# EAGLE board 4_digit_shift (EAGLE 5.06)
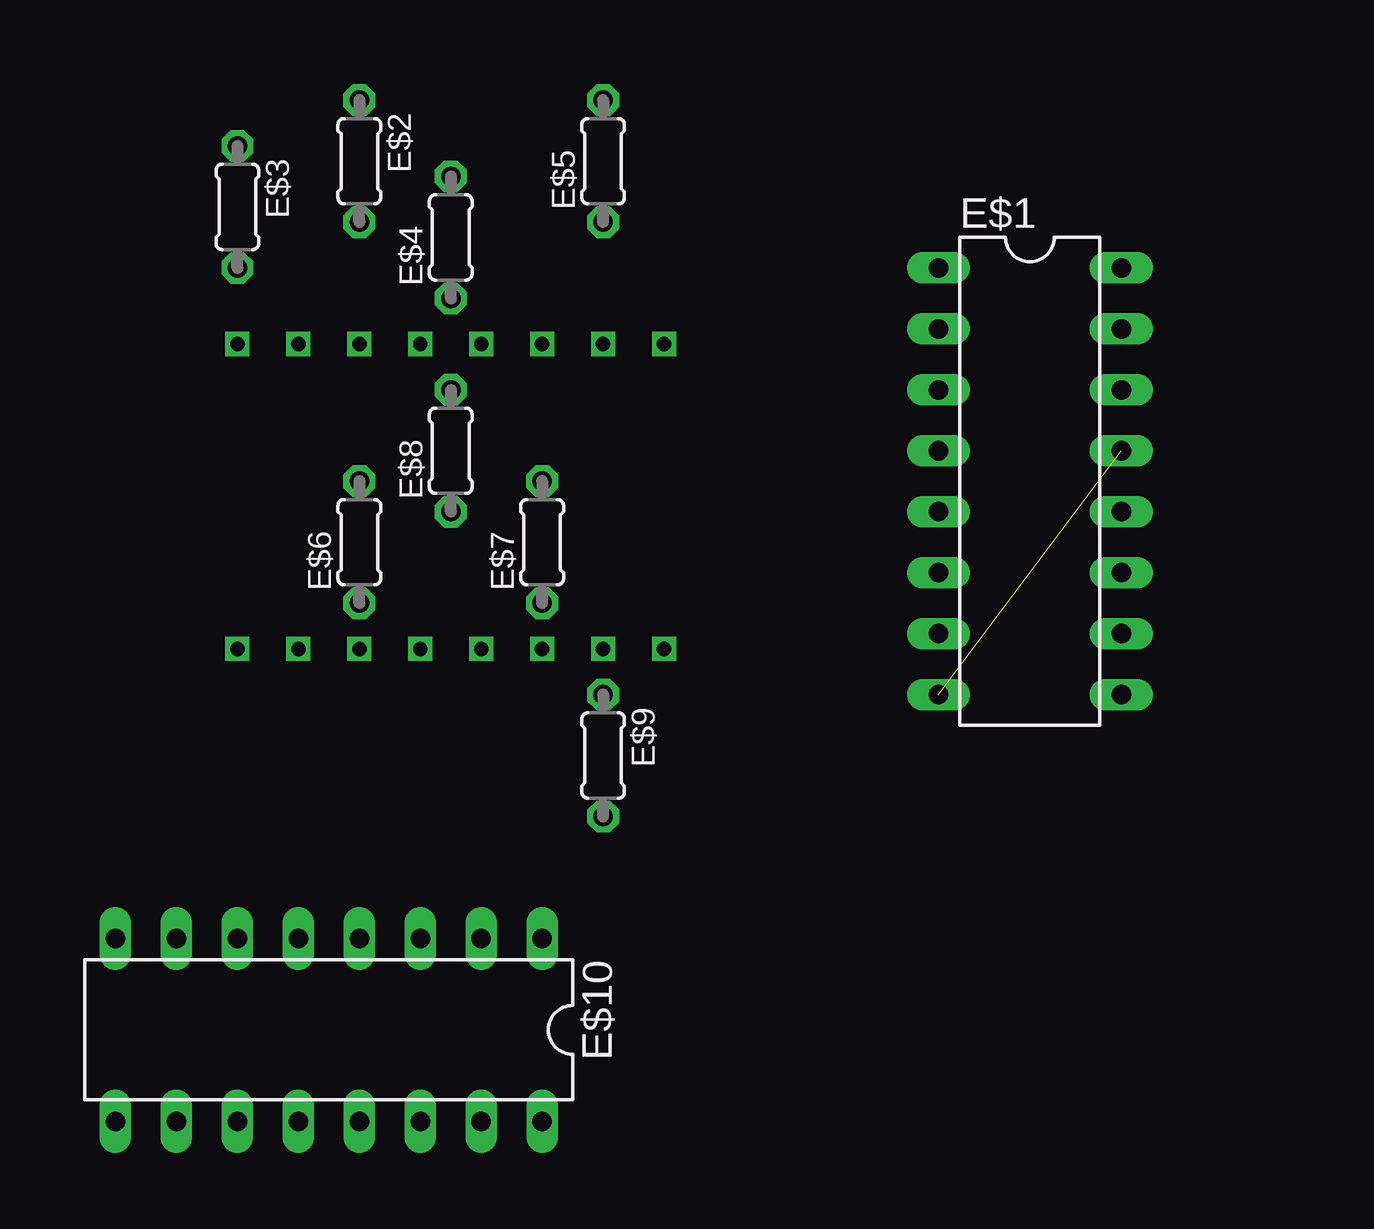
[diagram p0: board, top side]
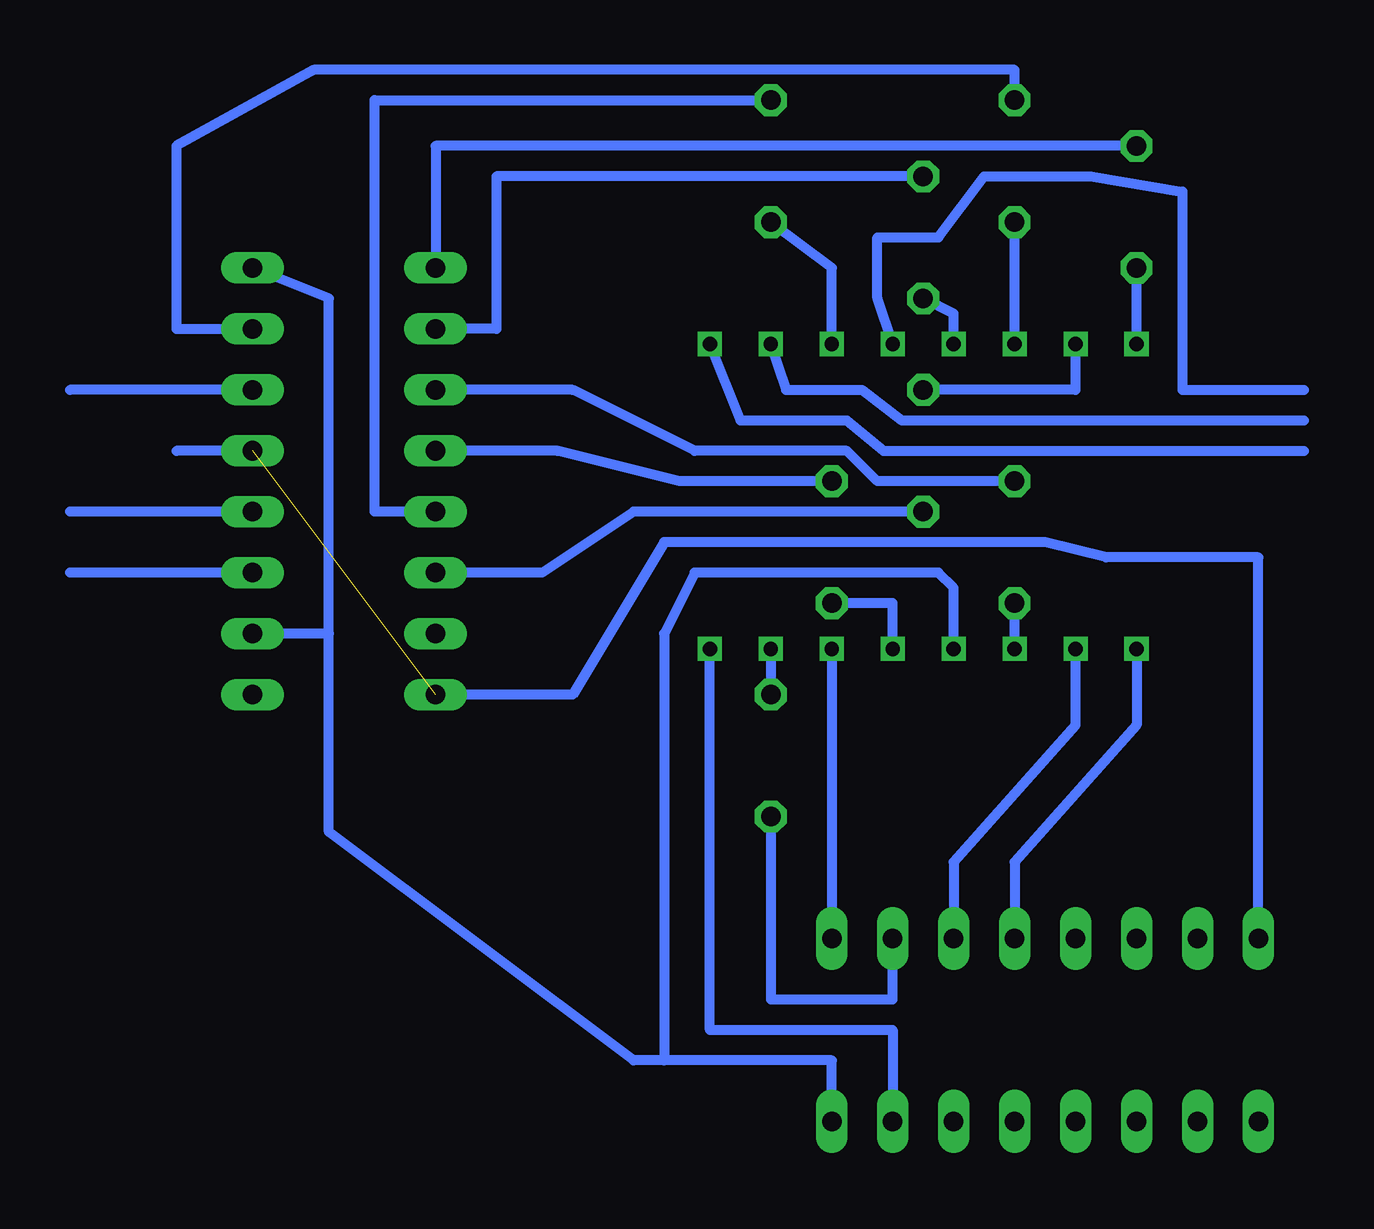
[diagram p1: board, bottom side, seen from below]

No outline drawn. Coordinates in mm, seen from the top.
Copper layers (1*16): Top 0.035mm / dielectric 1.5mm / Bottom 0.035mm
Design rules "default": minimum track width 10mil, minimum drill 24mil, track to track 8mil, track to pad 8mil, pad to pad 8mil, via to via 8mil, smd to smd 8mil, copper to edge 40mil, drill to drill 8mil, minimum pad ring 10mil, minimum via ring 8mil, stop-mask expansion 4mil, vias tented up to drill 0mil, thermal gap 10mil

## Footprints (pad centres in the part's own frame; a part is rotated, then mirrored left to right if it is on the bottom)
DIL16 = drill 0.813 long: 1 -8.89,-3.81; 2 -6.35,-3.81; 3 -3.81,-3.81; 4 -1.27,-3.81; 5 1.27,-3.81; 6 3.81,-3.81; 7 6.35,-3.81; 8 8.89,-3.81; 9 8.89,3.81; 10 6.35,3.81; 11 3.81,3.81; 12 1.27,3.81; 13 -1.27,3.81; 14 -3.81,3.81; 15 -6.35,3.81; 16 -8.89,3.81
0204/5 = drill 0.813 octagon: 1 -2.54,0; 2 2.54,0

## Placement (x,y rotation side)
E$1  [DIL16]  40.01,27.94 270 top
E$2  [0204/5]  12.06,41.27 270 top
E$3  [0204/5]  6.99,39.37 270 top
E$4  [0204/5]  15.88,38.1 90 top
E$5  [0204/5]  22.23,41.27 90 top
E$6  [0204/5]  12.06,25.4 90 top
E$7  [0204/5]  19.68,25.4 90 top
E$8  [0204/5]  15.88,29.21 90 top
E$9  [0204/5]  22.23,16.51 270 top
E$10  [DIL16]  10.79,5.08 180 top

## Library data of the parts
E$1 E$10 = 74xx-eu
E$2-E$9 = rcl

## Nets
5V: E$1.10 E$1.16 E$10.16
GND: E$1.8 E$1.13 E$10.8
S$1: E$9.2 E$10.2
S$2: E$3.2
S$3: E$8.2
S$4: E$2.2
S$5: E$6.1
S$6: E$10.3
S$8: E$4.1
S$9: E$7.1
S$10: E$10.1
S$11: E$10.4
S$14: E$5.1
S$17: E$1.15 E$2.1
S$18: E$1.1 E$3.1
S$19: E$1.2 E$4.2
S$20: E$1.5 E$5.2
S$21: E$1.3 E$6.2
S$22: E$1.4 E$7.2
S$23: E$1.6 E$8.1
S$24: E$1.14
S$25: E$1.12
S$26: E$1.11
S$27: E$10.15
S$28: E$9.1

## Tracks (layer width: path | path; a pad name or v marks a point on that pad's centre or on a via)
5V  (via drill 0.6)
  Bottom 0.406: E$1.16 40.64,35.56 40.64,21.59 | E$10.16 19.68,3.81 26.67,3.81 | 26.67,3.81 27.94,3.81 40.64,13.34 40.64,21.59 | 40.64,21.59 E$1.10 | v14.61,20.95 14.61,23.5 15.24,24.13 25.4,24.13 26.67,21.59 26.67,3.81
GND  (1 unrouted)
  Bottom 0.406: E$1.8 30.48,19.05 26.67,25.4 10.79,25.4 8.26,24.77 1.91,24.77 E$10.8 | E$1.13 46.99,29.21
S$1
  Bottom 0.406: E$9.2 22.23,6.35 17.14,6.35 E$10.2
S$2  (via drill 0.6)
  Bottom 0.406: v6.99,33.66 E$3.2
S$3  (via drill 0.6)
  Bottom 0.406: v9.53,33.66 9.53,31.75 E$8.2
S$4  (via drill 0.6)
  Bottom 0.406: v12.06,33.66 E$2.2
S$5  (via drill 0.6)
  Bottom 0.406: v12.06,20.95 E$6.1
S$6  (via drill 0.6)
  Bottom 0.406: v9.53,20.95 9.53,17.78 14.61,12.06 E$10.3
S$8  (via drill 0.6)
  Bottom 0.406: v14.61,33.66 14.61,34.92 E$4.1
S$9  (via drill 0.6)
  Bottom 0.406: v17.14,20.95 17.14,22.86 E$7.1
S$10  (via drill 0.6)
  Bottom 0.406: v19.68,20.95 E$10.1
S$11  (via drill 0.6)
  Bottom 0.406: v6.99,20.95 6.99,17.78 12.06,12.06 E$10.4
S$13  (via drill 0.6)
  Bottom 0.406: v17.14,33.66 17.78,35.56 17.78,38.1 15.24,38.1 13.34,40.64 8.89,40.64 5.08,40.01 5.08,31.75 0,31.75
S$14  (via drill 0.6)
  Bottom 0.406: v19.68,33.66 19.68,36.83 E$5.1
S$15  (via drill 0.6)
  Bottom 0.406: v22.23,33.66 21.59,31.75 18.41,31.75 16.76,30.48 0,30.48
S$16  (via drill 0.6)
  Bottom 0.406: v24.77,33.66 23.5,30.48 19.05,30.48 17.53,29.21 0,29.21
S$17
  Bottom 0.406: E$2.1 12.06,45.09 41.27,45.09 46.99,41.91 46.99,34.29 E$1.15
S$18
  Bottom 0.406: E$3.1 36.2,41.91 E$1.1
S$19
  Bottom 0.406: E$4.2 33.66,40.64 33.66,34.29 E$1.2
S$20
  Bottom 0.406: E$5.2 38.73,43.81 38.73,26.67 E$1.5
S$21
  Bottom 0.406: E$6.2 17.78,27.94 19.05,29.21 25.4,29.21 30.48,31.75 E$1.3
S$22
  Bottom 0.406: E$7.2 26.04,27.94 31.11,29.21 E$1.4
S$23
  Bottom 0.406: E$8.1 27.94,26.67 31.75,24.13 E$1.6
S$24
  Bottom 0.406: E$1.14 51.44,31.75
S$25
  Bottom 0.406: E$1.12 51.44,26.67
S$26
  Bottom 0.406: E$1.11 51.44,24.13
S$27  (via drill 0.6)
  Bottom 0.406: v24.77,20.95 24.77,5.08 17.14,5.08 E$10.15
S$28  (via drill 0.6)
  Bottom 0.406: v22.23,20.95 E$9.1